# EAGLE board soic08 (EAGLE 5.10)
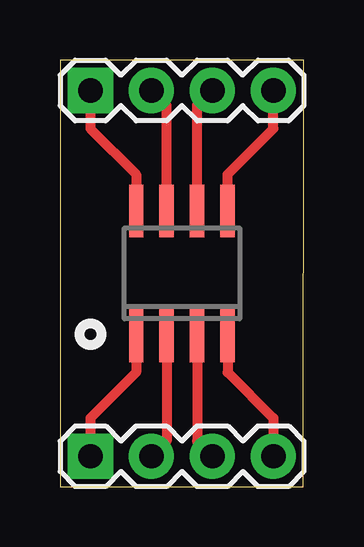
[diagram p0: board, top side]

Size 10.16 x 17.78 mm. Coordinates in mm from the lower left corner, seen from the top.
Outline: 0,0 10.14,0 10.16,17.78 0,17.78 0,0
Copper layers (1*16): Top 0.035mm / dielectric 1.5mm / Bottom 0.035mm
Design rules "default": minimum track width 10mil, minimum drill 24mil, track to track 8mil, track to pad 8mil, pad to pad 8mil, via to via 8mil, smd to smd 8mil, copper to edge 40mil, drill to drill 8mil, minimum pad ring 10mil, minimum via ring 8mil, stop-mask expansion 4mil, vias tented up to drill 0mil, thermal gap 10mil

## Footprints (pad centres in the part's own frame; a part is rotated, then mirrored left to right if it is on the bottom)
SO-08 = smd 0.6 x 2.2: 1 -1.905,-2.6; 2 -0.635,-2.6; 3 0.635,-2.6; 4 1.905,-2.6; 5 1.905,2.6; 6 0.635,2.6; 7 -0.635,2.6; 8 -1.905,2.6
1X04 = drill 1.016 pad 1.88 square: 1 0,0 | drill 1.016 pad 1.88 round: 2 2.54,0; 3 5.08,0; 4 7.62,0

## Placement (x,y rotation side)
IC1  24LC16BSN  [SO-08]  5.08,8.89 0 top
JP1  [1X04]  1.27,1.27 0 top
JP2  [1X04]  1.27,16.51 0 top

## Library data of the parts
IC1 = microchip
JP1 JP2 = SparkFun

## Nets
N$1: IC1.1 JP1.1
N$2: IC1.2 JP1.2
N$3: IC1.3 JP1.3
N$4: IC1.4 JP1.4
N$5: IC1.5 JP2.4
N$6: IC1.6 JP2.3
N$7: IC1.7 JP2.2
N$8: IC1.8 JP2.1

## Tracks (layer width: path | path; a pad name or v marks a point on that pad's centre or on a via)
N$1
  Top 0.406: IC1.1 3.17,4.76 1.27,2.86 JP1.1
N$2
  Top 0.406: IC1.2 4.45,1.91 JP1.2
N$3
  Top 0.406: IC1.3 5.71,1.91 JP1.3
N$4
  Top 0.406: IC1.4 6.99,4.76 8.89,2.86 JP1.4
N$5
  Top 0.406: IC1.5 6.99,13.02 8.89,14.92 JP2.4
N$6
  Top 0.406: IC1.6 5.71,15.88 JP2.3
N$7
  Top 0.406: IC1.7 4.45,15.88 JP2.2
N$8
  Top 0.406: JP2.1 1.27,14.92 3.17,13.02 IC1.8